# Altium PCB PCB_转接板方案_2023-02-11.pcbdoc
Units mil, origin at the board's own origin, x right, y up, seen from the top; angles counter-clockwise.
Board outline 4455 x 3830 mil, 2 copper layers (Top Layer, Bottom Layer); 12 components, 28 nets, 121 pads, 3 vias.
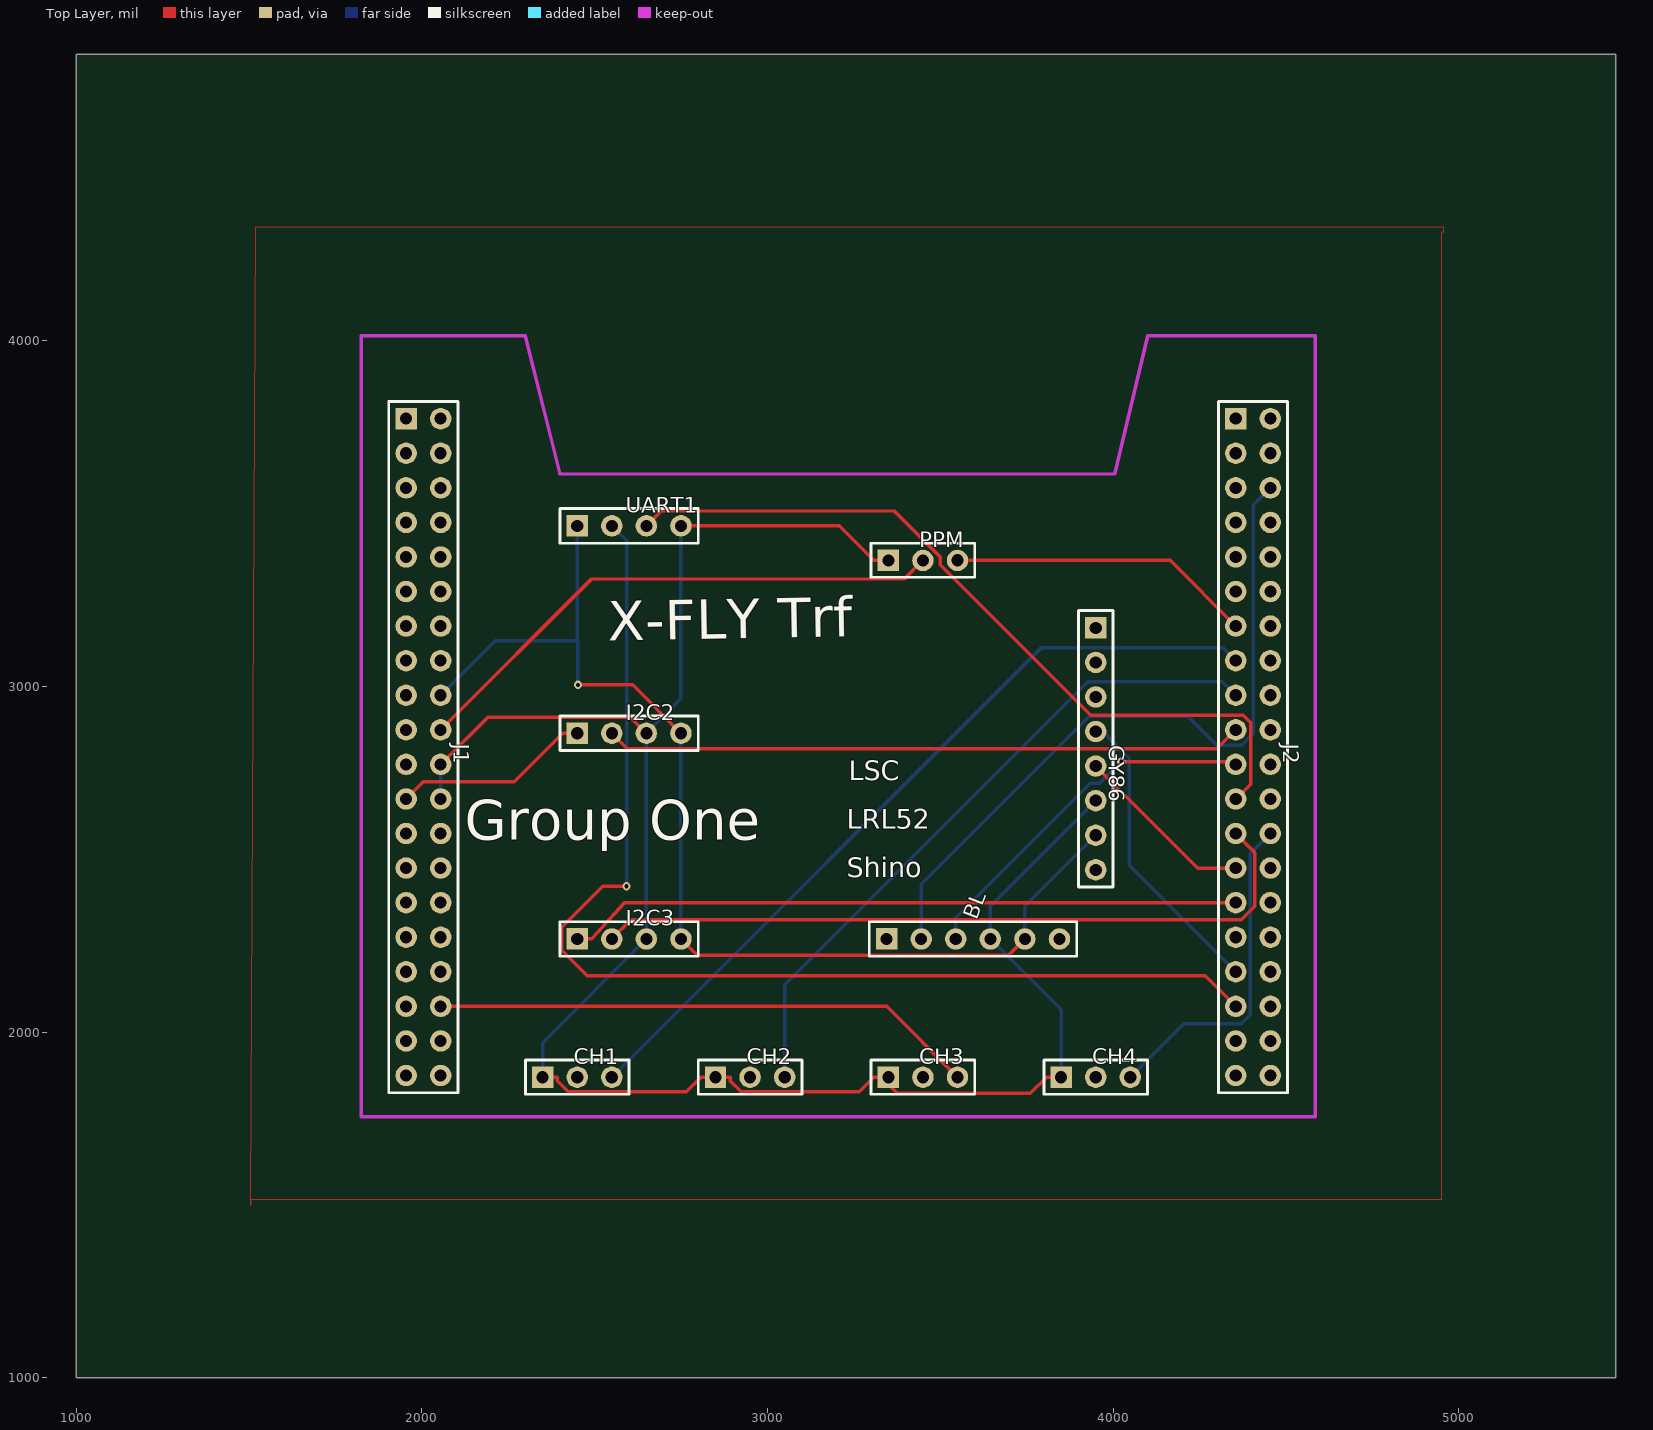
[diagram p0: Top Layer view]
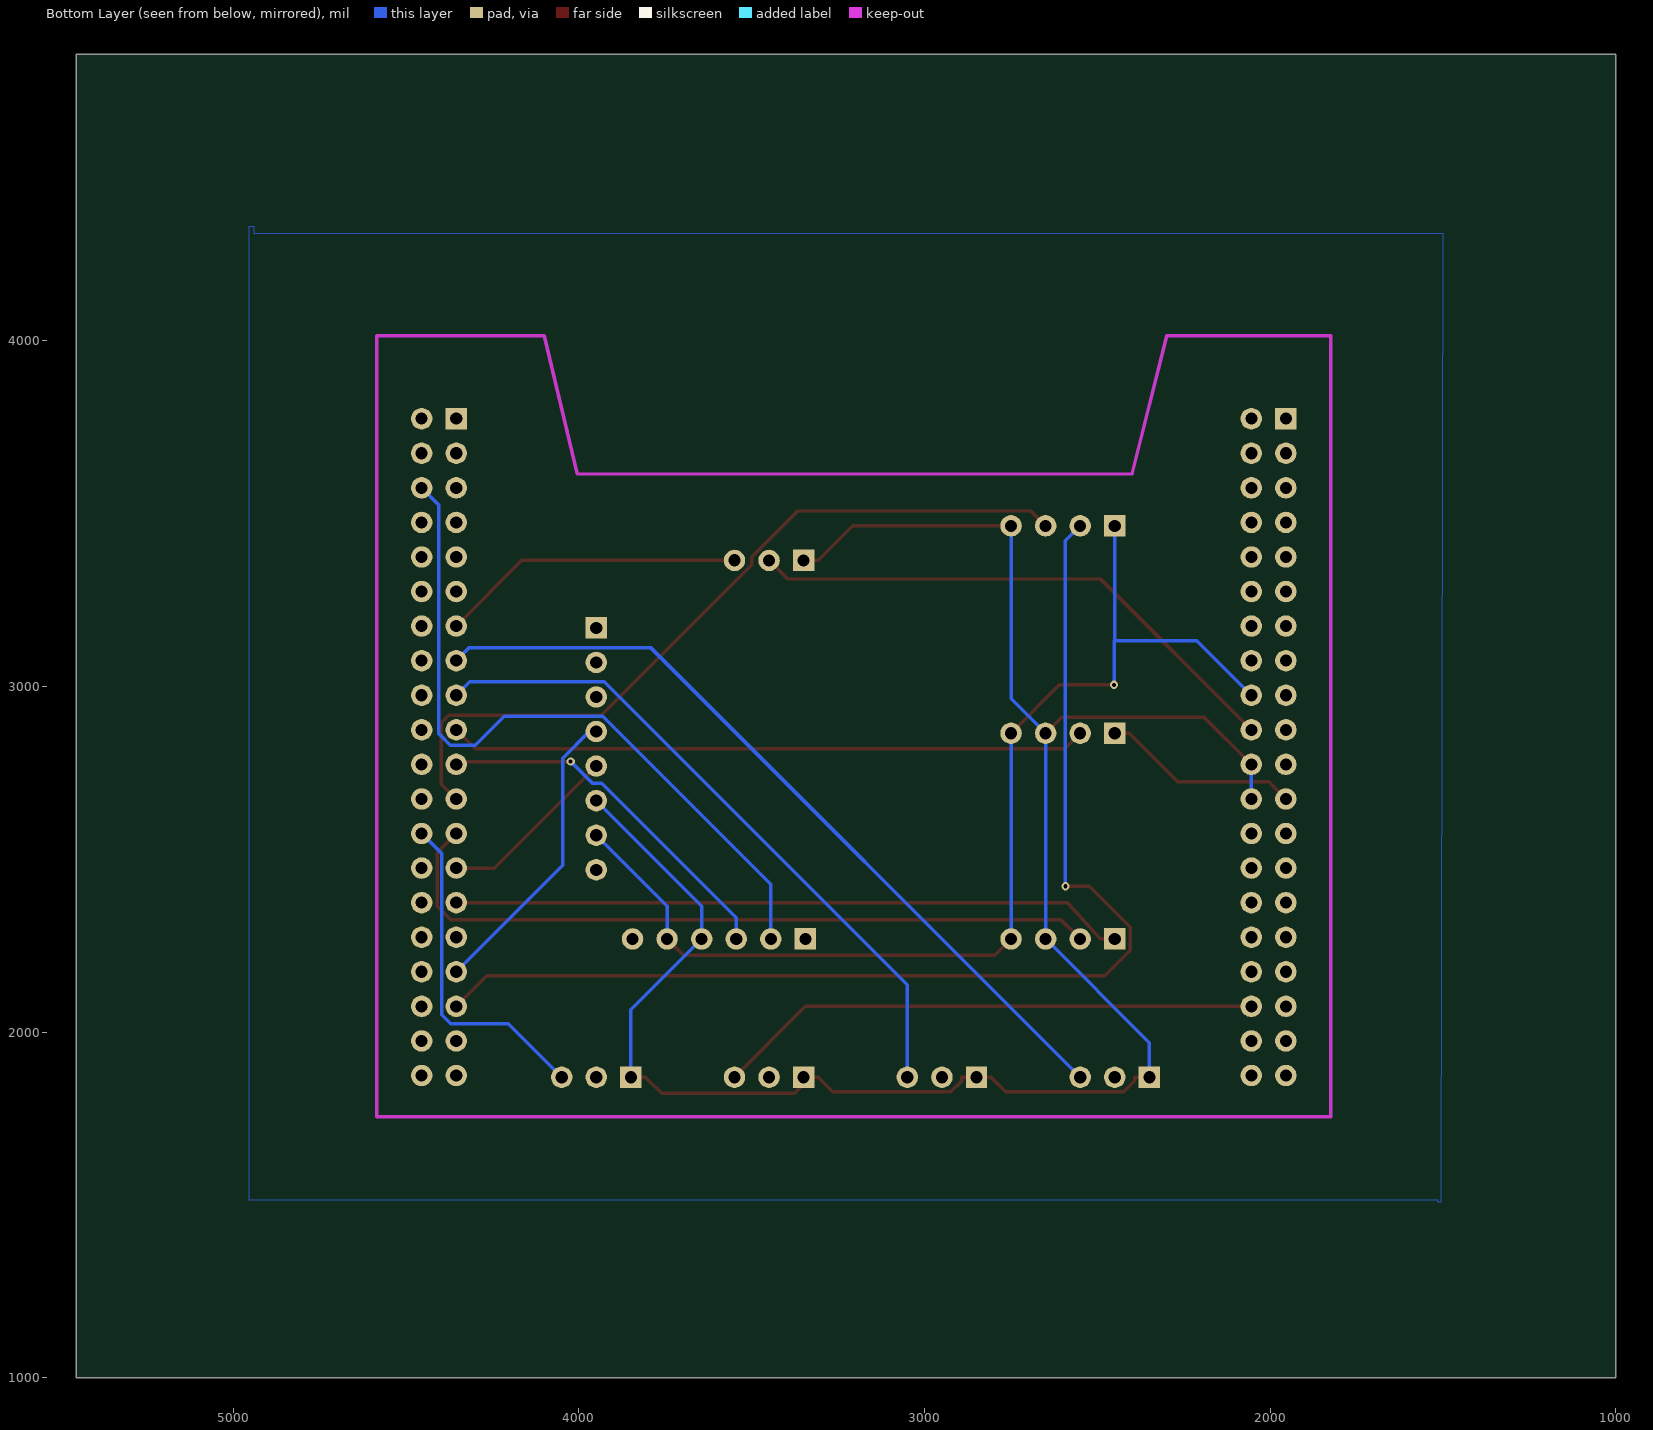
[diagram p1: Bottom Layer view, seen from below]

## Layer stack, top to bottom
Top Layer: signal copper (thickness not stored)
Dielectric: dielectric 12.6, FR-4, Dk 4.8
Bottom Layer: signal copper (thickness not stored)

## Board outline
5455,1000 1000,1000 1000,4830 5455,4830

## Components (designator, comment, footprint, x,y, rotation, side; value= is the part's Value field where it differs from the comment)
BL "HDR-F-2.54_1x6" HDR-F-2.54_1X6 3545,2270 r0 top
CH1 "HDR-F-2.54_1x3" HDR-F-2.54_1X3 2450,1870 r0 top
CH2 "HDR-F-2.54_1x3" HDR-F-2.54_1X3 2950,1870 r0 top
CH3 "HDR-F-2.54_1x3" HDR-F-2.54_1X3 3450,1870 r0 top
CH4 "HDR-F-2.54_1x3" HDR-F-2.54_1X3 3950,1870 r0 top
GY86 "HDR-F-2.54_1x8" HDR-F-2.54_1X8 3950,2870 r270 top
I2C2 "HDR-F-2.54_1x4" HDR-F-2.54_1X4 2600,2865 r0 top
I2C3 "HDR-F-2.54_1x4" HDR-F-2.54_1X4 2600,2270 r0 top
J1 "HDR-M-2.54_2x20" HDR-M-2.54_2X20 2005,2825 r270 top
J2 "HDR-M-2.54_2x20" HDR-M-2.54_2X20 4405,2825 r270 top
PPM "HDR-F-2.54_1x3" HDR-F-2.54_1X3 3450,3365 r0 top
UART1 "HDR-F-2.54_1x4" HDR-F-2.54_1X4 2600,3465 r0 top

## Footprints (in the part's own frame and the unit in brackets; to place one, negate y for a bottom-side part, rotate by r counter-clockwise, add the part's x,y. Pads: shape width x height; smd on the part's side, far side on the other; paste and mask are expansions set on the pad)
HDR-F-2.54_1X3 [mil]
  rect 62x62 hole 35: 1(-100,0)
  round 62 hole 35: 2(0,0)
  round 62 hole 36: 3(100,0)
  silkscreen extent -150,-49 150,50
HDR-F-2.54_1X4 [mil]
  rect 62x62 hole 35: 1(-150,0)
  round 62 hole 35: 2(-50,0) 3(50,0) 4(150,0)
  silkscreen extent -200,-50 200,50
HDR-F-2.54_1X6 [mil]
  rect 62x62 hole 35: 1(-200,0)
  round 62 hole 35: 2(-100,0) 3(0,0) 4(100,0) 5(200,0) 6(300,0)
  silkscreen extent -250,-50 350,50
HDR-F-2.54_1X8 [mil]
  rect 62x62 hole 35: 1(-300,0)
  round 62 hole 35: 2(-200,0) 3(-100,0) 4(0,0) 5(100,0) 6(200,0) 7(300,0) 8(400,0)
  silkscreen extent -350,-50 450,50
HDR-M-2.54_2X20 [mil]
  rect 62x62 hole 35: 1(-950,-50)
  round 62 hole 35: 2(-950,50) 3(-850,-50) 4(-850,50) 5(-750,-50) 6(-750,50) 7(-650,-50) 8(-650,50) 9(-550,-50) 10(-550,50) 11(-450,-50) 12(-450,50) 13(-350,-50) 14(-350,50) 15(-250,-50) 16(-250,50) 17(-150,-50) 18(-150,50) 19(-50,-50) 20(-50,50) 21(50,-50) 22(50,50) 23(150,-50) 24(150,50) 25(250,-50) 26(250,50) 27(350,-50) 28(350,50) 29(450,-50) 30(450,50) 31(550,-50) 32(550,50) 33(650,-50) 34(650,50) 35(750,-50) 36(750,50) 37(850,-50) 38(850,50) 39(950,-50) 40(950,50)
  silkscreen extent -1000,-100 1000,100

## Via types
v1: diameter 24, hole 12, Top Layer to Bottom Layer, tented both sides, 3 vias

## Nets (pads, with @x,y where several pads share a name; then routed paths per layer and width w, separated by ;. In a path a pad name is that pad's centre, name@x,y a point inside that pad or via, vN(x,y) a via of type N, cw(c..) or ccw(c..) an arc to the next point about the centre after c; other vN are vias at no path point)
3.3V: BL.5 GY86.7 I2C2.4 I2C3.4 J1.18 UART1.1 | length 3291.4
  Top Layer w10: v1(2452.12,3005) 2610,3005 I2C2.4 ; I2C3.4 2797.39,2222.61 3697.61,2222.61 BL.5
  Bottom Layer w10: J1.18 2213.05,3133.05 2450,3133.05 ; UART1.1 2450,3133.05 ; v1(2452.12,3005) 2452.12,3130.93 2450,3133.05 ; I2C3.4 I2C2.4 ; BL.5 3745,2365 GY86.7
5V: J1.20 PPM.2 | length 1598
  Top Layer w10: J1.20 2491.31,3311.31 3396.31,3311.31 PPM.2
CH1: CH1.3 J2.15 | length 2335.6
  Bottom Layer w10: CH1.3 3793,3113 4317,3113 J2.15
CH2: CH2.3 J2.17 | length 1951.9
  Bottom Layer w10: CH2.3 3050,2137.23 3927.15,3014.38 4315.62,3014.38 J2.17
CH3: CH3.3 J1.36 | length 1579.9
  Top Layer w10: J1.36 3345,2075 CH3.3
CH4: CH4.3 J2.26 | length 970
  Bottom Layer w10: CH4.3 4205,2025 4370.98,2025 4397.06,2051.08 4397.06,2517.06 J2.26
GND: BL.4 CH1.1 CH2.1 CH3.1 CH4.1 GY86.6 I2C2.3 I2C3.3 J1.22 J1.24 PPM.1 UART1.4 | length 5827.1
  Top Layer w10: J1.22 2191.74,2911.74 2603.26,2911.74 I2C2.3 ; CH1.1 2392.01,1870 2392.01,1859.5 2424.12,1827.39 2765.38,1827.39 2807.99,1870 CH2.1 2871.01,1870 2892.01,1870 2892.01,1859.5 2924.12,1827.39 3265.38,1827.39 3307.99,1870 CH3.1@3329,1870 ; UART1.4 3207.99,3465 3307.99,3365 PPM.1 ; CH3.1 CH3.1@3329,1870 ; CH4.1 3807.99,1870 3761.09,1823.1 3375.9,1823.1 CH3.1@3329,1870
  Bottom Layer w10: J1.24 J1.22 ; CH1.1 2350,1970 I2C3.3 I2C2.3 2750,2965 UART1.4 ; CH4.1 3850,2065 BL.4 3645,2365 GY86.6
I2C1_SCL: I2C2.2 J2.19 | length 1846.5
  Top Layer w10: I2C2.2 2595.08,2819.92 4299.92,2819.92 J2.19
I2C1_SDA: I2C2.1 J1.23 | length 573.7
  Top Layer w10: J1.23 2005,2725 2267.99,2725 2407.99,2865 I2C2.1
I2C2_SCL: GY86.5 J2.27 | length 527.2
  Top Layer w10: GY86.5 4245,2475 J2.27
I2C2_SDA: GY86.4 J2.33 | length 874.5
  Bottom Layer w10: GY86.4 3970.05,2870 4047.25,2792.8 4047.25,2482.75 J2.33
I2C3_SCL: I2C3.2 J2.25 | length 2132.7
  Top Layer w10: I2C3.2 2605.5,2325.5 4371.5,2325.5 4410,2364 4410,2520 J2.25
I2C3_SDA: I2C3.1 J2.29 | length 1951.8
  Top Layer w10: I2C3.1 2492.01,2270 2586.51,2375 J2.29
PPM: J2.13 PPM.3 | length 883.7
  Top Layer w10: PPM.3 4165,3365 J2.13
S$2758: 
S$2762: 
S$2772: 
S$2776: 
S$2780: 
S$2790: 
S$2798: 
S$2835: 
S$2854: 
S$2858: 
UART1_RX: J2.35 UART1.2 | length 3380.8
  Top Layer w10: v1(2592.65,2422.5) 2523.61,2422.5 2404.88,2303.77 2404.88,2237.49 2479.2,2163.17 4266.83,2163.17 J2.35
  Bottom Layer w10: UART1.2 2592.65,3422.35 v1(2592.65,2422.5)
UART1_TX: J2.23 UART1.3 | length 2270.9
  Top Layer w10: UART1.3 2692.94,3507.94 3367.24,3507.94 3500.23,3374.95 3500.23,3352.44 3935.61,2917.06 4376.47,2917.06 4397.87,2895.66 4397.87,2717.87 J2.23
UART6_RX: BL.3 J2.21 | length 1061.6
  Top Layer w10: v1(4024.2,2783.24) 4346.76,2783.24 J2.21
  Bottom Layer w10: BL.3 3545,2330.8 3934.2,2720 3960.96,2720 v1(4024.2,2783.24)
UART6_TX: BL.2 J2.6 | length 2100.8
  Bottom Layer w10: BL.2 3445,2428.01 3931.4,2914.41 4215.61,2914.41 4300.02,2830 4371.92,2830 4405,2863.08 4405,3525 J2.6
pads on no net: BL.1 BL.6 CH1.2 CH2.2 CH3.2 CH4.2 GY86.1 GY86.2 GY86.3 GY86.8 J1.1 J1.2 J1.3 J1.4 J1.5 J1.6 J1.7 J1.8 J1.9 J1.10 J1.11 J1.12 J1.13 J1.14 J1.15 J1.16 J1.17 J1.19 J1.21 J1.25 J1.26 J1.27 J1.28 J1.29 J1.30 J1.31 J1.32 J1.33 J1.34 J1.35 J1.37 J1.38 J1.39 J1.40 J2.1 J2.2 J2.3 J2.4 J2.5 J2.7 J2.8 J2.9 J2.10 J2.11 J2.12 J2.14 J2.16 J2.18 J2.20 J2.22 J2.24 J2.28 J2.30 J2.31 J2.32 J2.34 J2.36 J2.37 J2.38 J2.39 J2.40

## Polygon pours and split planes (outlines as drawn)
GND on Bottom Layer (solid): 1505,1510 1505,1525 1500,4310 4940,4310 4940,4330 4955,4330 4955,1515 1515,1515 1515,1510 1505,1510
GND on Top Layer (solid): 1505.08,1515 1505,1500 1505.08,1515
GND on Top Layer (solid): 1505.08,1515 1520,4330 4955,4330 4955,4315 4950,4315 4950,1515 1505.08,1515

## Silkscreen, mask and mechanical layers (free items; w line width, h text height)
Top Overlay:
  text "X-FLY Trf" at 2540,3095 h196.85 r1
  text "LSC" at 3235,2710 h98.42
  text "LRL52" at 3230,2570 h98.42
  text "Group One" at 2125,2520 h196.85
  text "Shino" at 3230,2430 h98.42
Document:
  lines w0.1: 3227.49,2914.99 3227.51,2915.01